# Altium PCB senzMate_ecandMoisture_pcb_design_cycle_2.PcbDoc (part 1 of 2)
Units mil, origin at the board's own origin, x right, y up, seen from the top; angles counter-clockwise.
Board outline 984.25 x 5177.17 mil, 2 copper layers (Top Layer, Bottom Layer); 38 components, 18 nets, 84 pads, 27 vias.
Unrouted connection lines stored in the file: 1.
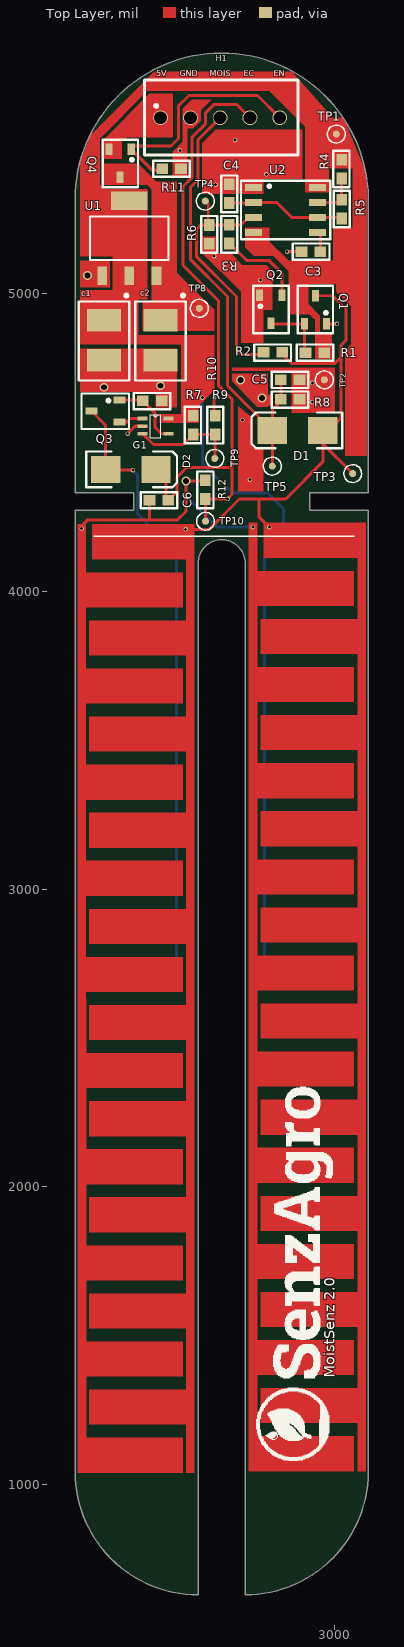
[diagram p0: Top Layer view]
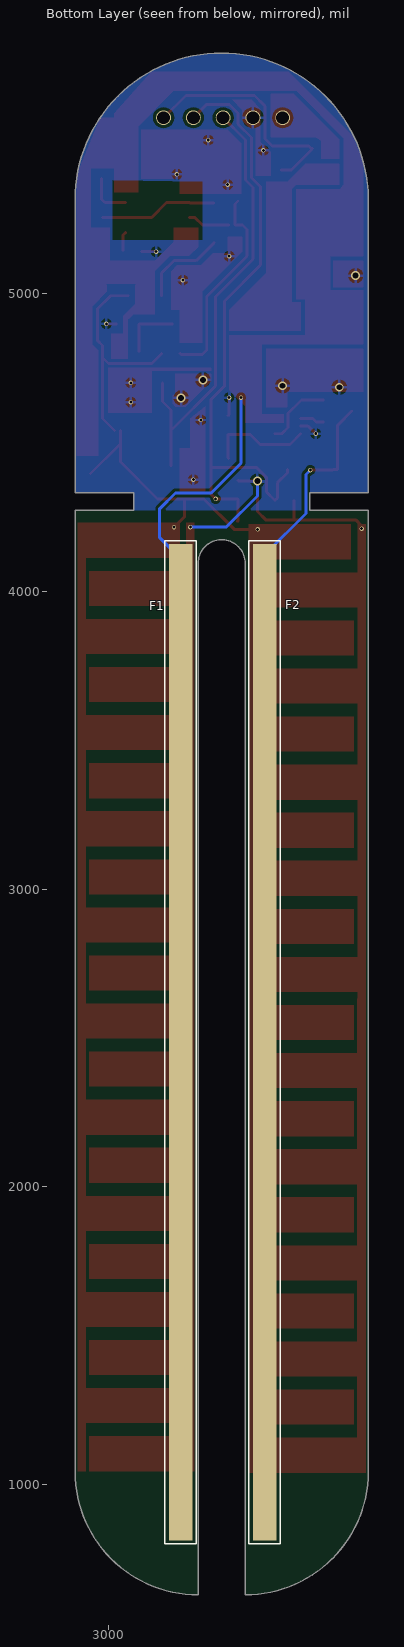
[diagram p1: Bottom Layer view, seen from below]
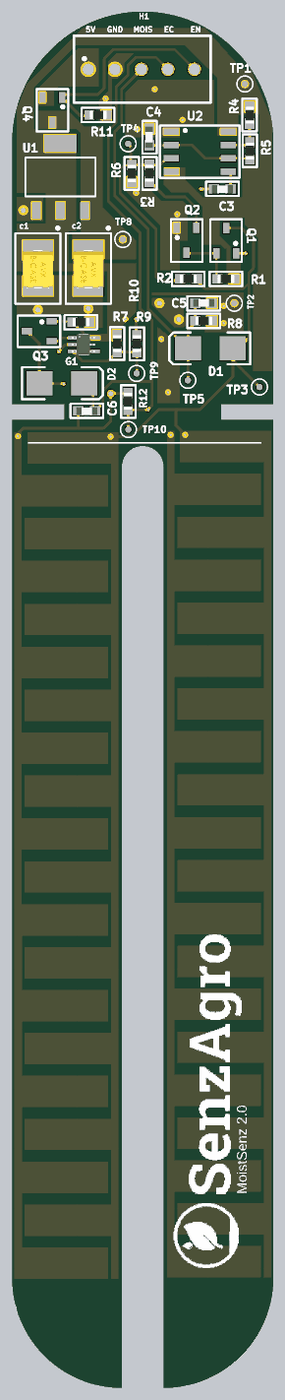
[diagram p2: 3D render of the assembled board from above, using the file's embedded part models]

## Layer stack, top to bottom
Top Solder: solder mask 0.4, Solder Resist, Dk 3.5
Top Layer: signal copper 1.4
Dielectric 1: dielectric 12.6, FR-4, Dk 4.8
Bottom Layer: signal copper 1.4
Bottom Solder: solder mask 0.4, Solder Resist, Dk 3.5

## Board outline
2127.87,1043.26 2127.87,4271.61 2324.72,4271.61 2324.72,4330.66 2127.87,4330.66 2127.87,5314.91 cw(c2620,5314.91) 3112.13,5314.91 3112.13,4330.66 2915.28,4330.66 2915.28,4271.61 3112.13,4271.61 3112.13,1043.26 cw(c2698.74,1043.26) 2698.74,629.87 2698.74,4094.44 ccw(c2620,4094.44) 2541.26,4094.44 2541.26,629.87 cw(c2541.26,1043.26)

## Design rules (kind name [scope] priority, off if disabled: settings)
Clearance [All] p1: gap=10 ignorepadtopadclearanceinfootprint=FALSE except(0: Arc-Hole Track-Hole SMDPad-Hole THPad-Hole Via-Hole Fill-Hole Poly-Hole Region-Hole Text-Hole)
MinimumSolderMaskSliver [All] p1: minsoldermaskwidth=4
PolygonConnect [All] p1: connectstyle=Relief reliefconductorwidth=10 reliefentries=4 polygonreliefangle="90 Angle" airgapwidth=10
RoutingVias [All] p1: holewidth=10 width=15 viastyle="Through Hole" minholewidth=5 minwidth=10 maxholewidth=20 maxwidth=30
SilkToSilkClearance [All] p1: silktosilkclearance=3
SilkToSolderMaskClearance [IsPad] p1: minsilkscreentomaskgap=4 clearancetoexposedcopper=TRUE
SolderMaskExpansion [All] p1: expansion=4
Width [All] p1: maxlimit=30 minlimit=10 preferedwidth=10
27 further rules are at their usual default settings.

## Components (designator, comment, footprint, x,y, rotation, side; value= is the part's Value field where it differs from the comment)
c1 "100uf" TAN_CAP 2225,4842.68 r270 top value=100uF
c2 "10uf" TAN_CAP 2415,4842.68 r270 top value=10uF
C3 "SMT Ceremic capacitors" CAPACITOR_0603 2920,5140 r0 top value=0.1uF
C4 "SMT Ceremic capacitors" CAPACITOR_0603 2645,5335 r270 top value=390pF
C5 "SMT Ceremic capacitors" CAPACITOR_0603 2850,4710 r180 top value=10uF
C6 "SMT Ceremic capacitors" CAPACITOR_0603 2409,4305 r0 top value=10uF
D1 "Diode" DIODE 2875,4540 r180 top
D2 "Diode" DIODE 2315,4409 r0 top
F1 "Hole" HOLE 2758,2486 r90 bottom
F2 "Hole" HOLE 2476,2486 r90 bottom
G1 "LMV721" LM721 2355,4580 r0 top
H1 "HEADER_1X" CONNECTOR 2565,5590 r0 top
Q1 "" SOT95P245X110-3N 2935,4945 r90 top
Q2 "" SOT95P245X110-3N 2785,4946.97 r270 top
Q3 "MMBT3904" SOT95P245X110-3N 2230,4605 r180 top
Q4 "SI2307" SI2307 2285,5435 r270 top
R1 "Res3" RES_0603 2935,4805 r0 top value=10K
R2 "Res3" RES_0603 2790,4798.11 r180 top value=2.7K
R3 "Res3" RES_0603 2648.94,5197.05 r270 top value=10K
R4 "Res3" RES_0603 3018.91,5419.53 r90 top value=4.7K
R5 "Res3" RES_0603 3020,5285 r90 top value=4.7K
R6 "Res3" RES_0603 2575,5200 r90 top value=10K
R7 "Res3" RES_0603 2520,4560 r90 top value=10K
R8 "Res3" RES_0603 2848.03,4640 r180 top value=1M
R9 "Res3" RES_0603 2602,4556 r270 top value=1K
R10 "Res3" RES_0603 2385,4635 r180 top value=45.3K
R11 "Res3" RES_0603 2450,5415 r180 top value=1M
R12 "Res3" RES_0603 2569,4339 r270 top value=1M
TP1 "Test points" TEST_POINT 3005,5535 r90 top
TP2 "Test points" TEST_POINT 2965,4710 r90 top
TP3 "Test points" TEST_POINT 3060,4395 r90 top
TP4 "Test points" TEST_POINT 2565,5310 r90 top
TP5 "Test points" TEST_POINT 2790,4420 r90 top
TP8 "Test points" TEST_POINT 2545,4950 r90 top
TP9 "Test points" TEST_POINT 2597,4446 r90 top
TP10 "Test points" TEST_POINT 2566,4235 r90 top
U1 "LM1117MP-3.3" *SOT230P696X180-4N 2310,5185 r90 top
U2 "TS555" SOP127P600X175-8N 2835,5280 r0 top

## Footprints (in the part's own frame and the unit in brackets; to place one, negate y for a bottom-side part, rotate by r counter-clockwise, add the part's x,y. Pads: shape width x height; smd on the part's side, far side on the other; paste and mask are expansions set on the pad)
*SOT230P696X180-4N [mil]
  rect 63x33 smd: 1(-126,91) 2(-126,0) 3(-126,-91)
  rect 63x122 smd: 4(126,0)
  silkscreen extent -73,-132 73,132
CAPACITOR_0603 [mm]
  rect 1x0.9 smd: 1(-0.8,0) 2(0.8,0)
  silkscreen extent -1.55,-0.67 1.58,0.7, body extent -1,-0.41 1,0.35, height 1.36
CONNECTOR [mm]
  round 1.27 hole 1.1: 1(-3.81,0) 2(-1.27,0) 3(1.27,0) 4(3.81,0) 5(6.35,0)
  silkscreen extent -5.2,-3.17 7.9,3.2
DIODE [mm]
  rect 2.5x2.3 smd: 1(-2.15,0) 2(2.15,0)
  silkscreen extent -3.81,-1.52 3.94,1.52
HOLE [mm]
  rect 85x2 smd: 1(0,0)
  silkscreen extent -42.8,-1.35 42.75,1.35
LM721 [mm]
  rect 0.85x0.32 smd: 1(0,0) 2(0,-0.65) 3(0,-1.3) 4(2.2,-1.3) 5(2.2,0)
  silkscreen extent 0.64,-1.63 1.52,0.33, body extent -0.05,-1.65 2.15,0.35, height 1.01
RES_0603 [mm]
  rect 1x0.9 smd: 1(-0.85,-0.1) 2(0.75,-0.1)
  silkscreen extent -1.6,-0.77 1.53,0.6, body extent -0.85,-0.5 0.75,0.3, height 0.41
SI2307 [mm]
  rect 1x0.6 smd: 1(-1.25,0.8) 2(-1.25,-1.1) 3(1.15,-0.15)
  silkscreen extent -2.05,-1.64 2,1.37, body extent -0.75,-1.65 0.65,1.35, height 1.1
SOP127P600X175-8N [mm] "SOP, 8-Leads, Body 4.90x3.90mm, Pitch 1.27mm, IPC Medium Density"
  rect 1.45x0.6 smd: 1(-2.725,1.905) 2(-2.725,0.635) 3(-2.725,-0.635) 4(-2.725,-1.905) 5(2.725,-1.905) 6(2.725,-0.635) 7(2.725,0.635) 8(2.725,1.905)
  silkscreen extent -3.81,-2.5 3.81,2.5, body extent -2,-2.5 2,2.5, height 1.75
SOT95P245X110-3N [mm] "SOT23, 3-Leads, Body 2.90x2.45mm, Pitch 0.95mm, IPC Medium Density"
  rect 1x0.6 smd: 1(-1.2,-0.95) 2(-1.2,0.95) 3(1.2,0)
  silkscreen extent -2,-1.49 2.05,1.52, body extent -0.7,-1.5 0.7,1.5, height 1.1
TAN_CAP [mm]
  rect 1.9x2.88 smd: 1(-1.71,0) 2(1.71,0)
  silkscreen extent -3.94,-2.16 3.43,2.16, body extent -1.72,-1.46 1.98,1.47, height 2.03
TEST_POINT [mm]
  round 0.6 smd: 1(0,0)
  silkscreen extent -0.76,-0.76 0.76,0.76

## Part data
c1: library part tant_cap, "Tantalum Surface Mount Capacitors – Standard Tantalum", Capacitance=100uF, Case/Package=1411, Case Code (Metric)=3528, Dielectric Material=Tantalum, ESR (Equivalent Series Resistance)=40mR, Leakage Current=63uA, Manufacturer=KEMET, Manufacturer Part Number=T520B107M006ATE040, Max Operating Temperature=105°C, Min Operating Temperature=-55°C, Package Quantity=1, Ripple Current=3A, Supplier Part Number 1=399-4008-1-ND, Tolerance=20%, Voltage=6.3V, Voltage Rating (DC)=6V, Case Code (Imperial)=1411, ComponentLink1Description=http://www.mouser.com/ds/2/212/KEM_T2015_T520-368569.pdf?src-supplier=Mouser, ComponentLink1URL=http://www.mouser.com/ds/2/212/KEM_T2015_T520-368569.pdf?src-supplier=Mouser, ComponentLink2Description=https://www.verical.com/server-webapp/html/getDatasheet?partID=72546&src-supplier=Verical, ComponentLink2URL=https://www.verical.com/server-webapp/html/getDatasheet?partID=72546&src-supplier=Verical, ComponentLink3Description=https://www.distrelec.biz/Web/Downloads/_t/ds/KEM_T2015_T520_eng_tds.pdf?mime=application%2Fpdf&src-supplier=Distrelec, ComponentLink3URL=https://www.distrelec.biz/Web/Downloads/_t/ds/KEM_T2015_T520_eng_tds.pdf?mime=application%2Fpdf&src-supplier=Distrelec, ComponentLink4Description=https://www.alliedelec.com/m/d/1e5f3e263f50a84b9c01f3b24923ff5b.pdf?src-supplier=Allied+Electronics, ComponentLink4URL=https://www.alliedelec.com/m/d/1e5f3e263f50a84b9c01f3b24923ff5b.pdf?src-supplier=Allied+Electronics, ComponentLink5Description=http://www.farnell.com/datasheets/40865.pdf?src-supplier=Farnell, ComponentLink5URL=http://www.farnell.com/datasheets/40865.pdf?src-supplier=Farnell, ComponentLink6Description=https://content.kemet.com/datasheets/KEM_T2076_T52X-530.pdf?src-supplier=Digi-Key, ComponentLink6URL=https://content.kemet.com/datasheets/KEM_T2076_T52X-530.pdf?src-supplier=Digi-Key, ComponentLink7Description=http://www.kemet.com/kemet/web/homepage/kechome.nsf/file/T520%20Series/$file/KEM_T2015_T520.pdf?src-supplier=Element14, ComponentLink7URL=http://www.kemet.com/kemet/web/homepage/kechome.nsf/file/T520%20Series/$file/KEM_T2015_T520.pdf?src-supplier=Element14, Depth=2.8mm, Dissipation Factor=8%, Features="General Purpose", Height=1.9mm, Height - Seated (Max)=0.083inch, Lead Free="Lead Free", Lead Pitch=1.9mm, Length=3.5mm, Life (Hours)=2000Hour, Mount="Surface Mount,PCB", Number of Pins=2, Packaging="Tape and Reel", Polarity=Polar, Pricing 1="1=0.88, 10=0.665, 100=0.4759, 500=0.3685, 1000=0.3173 (USD)", Radiation Hardening=No, REACH SVHC="No SVHC", Stock 1=86697, Supplier 1=Digi-Key, Termination=SMD/SMT, Voltage Rating=6.3V, Width=2.8mm
c2: library part tant_cap, "Tantalum Surface Mount Capacitors – Standard Tantalum", Capacitance=10uF, Case/Package=1411, Case Code (Metric)=3528, Dielectric Material=Tantalum, ESR (Equivalent Series Resistance)=3.5R, Leakage Current=600nA, Manufacturer=KEMET, Manufacturer Part Number=T491B106K006AT, Max Operating Temperature=125°C, Min Operating Temperature=-55°C, Package Quantity=1, Ripple Current=156mA, Supplier Part Number 1=399-3704-1-ND, Tolerance=10%, Voltage=6.3V, Case Code (Imperial)=1411, ComponentLink1Description=http://www.mouser.com/ds/2/212/KEM_T2005_T491-1093550.pdf?src-supplier=Mouser, ComponentLink1URL=http://www.mouser.com/ds/2/212/KEM_T2005_T491-1093550.pdf?src-supplier=Mouser, ComponentLink2Description=https://www.verical.com/server-webapp/html/getDatasheet?partID=114876&src-supplier=Verical, ComponentLink2URL=https://www.verical.com/server-webapp/html/getDatasheet?partID=114876&src-supplier=Verical, ComponentLink3Description=https://search.kemet.com/component-edge/download/datasheet/T491B106K006AT.pdf?src-supplier=Digi-Key, ComponentLink3URL=https://search.kemet.com/component-edge/download/datasheet/T491B106K006AT.pdf?src-supplier=Digi-Key, ComponentLink4Description=https://www.alliedelec.com/m/d/1172a60f7bb3eb66344f86e8fb9ddbde.pdf?src-supplier=Allied+Electronics, ComponentLink4URL=https://www.alliedelec.com/m/d/1172a60f7bb3eb66344f86e8fb9ddbde.pdf?src-supplier=Allied+Electronics, ComponentLink5Description=http://www.kemet.com/kemet/web/homepage/kechome.nsf/file/T491%20Series/$file/KEM_T2005_T491.pdf?src-supplier=Farnell, ComponentLink5URL=http://www.kemet.com/kemet/web/homepage/kechome.nsf/file/T491%20Series/$file/KEM_T2005_T491.pdf?src-supplier=Farnell, ComponentLink6Description=http://www.farnell.com/datasheets/1854511.pdf?src-supplier=Element14, ComponentLink6URL=http://www.farnell.com/datasheets/1854511.pdf?src-supplier=Element14, ComponentLink7Description=http://www.kemet.com/kemet/web/homepage/kechome.nsf/file/T491%20Series/$file/KEM_T2005_T491.pdf?src-supplier=Element14, ComponentLink7URL=http://www.kemet.com/kemet/web/homepage/kechome.nsf/file/T491%20Series/$file/KEM_T2005_T491.pdf?src-supplier=Element14, ComponentLink8Description=http://www.jameco.com/Jameco/Products/ProdDS/1640982.pdf?src-supplier=Jameco, ComponentLink8URL=http://www.jameco.com/Jameco/Products/ProdDS/1640982.pdf?src-supplier=Jameco, ComponentLink9Description=https://www.distrelec.biz/Web/Downloads/_t/ds/KEM_T2005_T491_eng_tds.pdf?mime=application%2Fpdf&src-supplier=Distrelec, ComponentLink9URL=https://www.distrelec.biz/Web/Downloads/_t/ds/KEM_T2005_T491_eng_tds.pdf?mime=application%2Fpdf&src-supplier=Distrelec, ComponentLink10Description=http://www.rapidonline.com/pdf/458281_da_en_01.pdf?src-supplier=Rapid+Electronics, ComponentLink10URL=http://www.rapidonline.com/pdf/458281_da_en_01.pdf?src-supplier=Rapid+Electronics, ComponentLink11Description=http://uk.rs-online.com/webdocs/1529/0900766b815290d2.pdf?src-supplier=RSComponents, ComponentLink11URL=http://uk.rs-online.com/webdocs/1529/0900766b815290d2.pdf?src-supplier=RSComponents, Depth=2.8mm, Dissipation Factor=6%, Features="General Purpose", Height=1.9mm, Height - Seated (Max)=0.083inch, Lead Free="Lead Free", Length=3.5mm, Life (Hours)=2000Hour, Mount="Surface Mount,PCB", Number of Pins=2, Packaging="Tape and Reel", Polarity=Polar, Pricing 1="1=0.49, 10=0.345, 100=0.227, 500=0.1681, 1000=0.1429 (USD)", Radiation Hardening=No, REACH SVHC="No SVHC", Stock 1=12761, Supplier 1=Digi-Key, Termination=SMD/SMT, Voltage Rating=6.3V, Voltage Rating (DC)=6.3V, Weight=0.002293oz, Width=2.8mm
C3: library part Cap, "Capacitor", Capacitance=0.10µF, Manufacturer=TDK, Manufacturer Part Number=CGA3E2X8R1E104K080AE, Operating Temperature="-55°C ~ 150°C", Package / Case="0603 (1608 Metric)", Ratings=AEC-Q200, Supplier Part Number 1=445-173658-1-ND, Temperature Coefficient=X8R, Tolerance=±10%, Voltage - Rated=25V, Applications="Automotive, Boardflex Sensitive", Category=Capacitors, Family="Ceramic Capacitors", Features="Soft Termination", Height - Seated (Max)=-, LatestRevisionDate=17-Jul-2002, LatestRevisionNote="Re-released for DXP Platform.", Lead Spacing=-, Lead Style=-, Mounting Type="Surface Mount, MLCC", PackageDescription="Radial Cap, Thru-Hole; 2 Leads; 0.3 in Pin Spacing", PackageReference=RAD-0.3, Packaging="Tape & Reel (TR)", Pricing 1="1=0.27, 10=0.182, 100=0.1032, 500=0.0729, 1000=0.0638 (USD)", Published=8-Jun-2000, Publisher="Altium Limited", Series=CGA, Size / Dimension="0.063\" L x 0.031\" W (1.60mm x 0.80mm)", Stock 1=0, Supplier 1=Digi-Key, Thickness (Max)="0.037\" (0.95mm)"
C4: library part Cap, "Capacitor", Capacitance=390pF, Manufacturer=TDK, Manufacturer Part Number=CGA3E2C0G1H391J080AA, Operating Temperature="-55°C ~ 125°C", Package / Case="0603 (1608 Metric)", PCN Part Number="MLCC Part Number Change 30/Nov/2012", Ratings=AEC-Q200, Standard Package=1, Supplier Part Number 1=445-5647-1-ND, Temperature Coefficient="C0G, NP0", Tolerance=±5%, Voltage - Rated=50V, Applications=Automotive, Category=Capacitors, ComponentLink1Description=http://www.mouser.com/ds/2/400/lcc_automotive_general_en-843974.pdf?src-supplier=Mouser, ComponentLink1URL=http://www.mouser.com/ds/2/400/lcc_automotive_general_en-843974.pdf?src-supplier=Mouser, EDA / CAD Models="Download from Accelerated Designs", Family="Ceramic Capacitors", Featured Product="CGA Series MLCC Capacitors", LatestRevisionDate=17-Jul-2002, LatestRevisionNote="Re-released for DXP Platform.", Mounting Type="Surface Mount, MLCC", Online Catalog="CGA Series, Automotive General, Mid and High Voltage", Other Names=445-5647-6, PackageDescription="Radial Cap, Thru-Hole; 2 Leads; 0.3 in Pin Spacing", PackageReference=RAD-0.3, Packaging=Digi-Reel®, Pricing 1="1=0.22, 10=0.153, 100=0.072, 500=0.0505, 1000=0.0418 (USD)", Product Training Modules="CGA Series for Automotive Applications SEAT, CCV, and TVCL Design Tools Guide to Replacing an Electrolytic Capacitor with an MLCC", Published=8-Jun-2000, Publisher="Altium Limited", RoHS Information="CGA Series, RoHS Cert of Compliance", Series=CGA, Size / Dimension="0.063\" L x 0.031\" W (1.60mm x 0.80mm)", Stock 1=2144, Supplier 1=Digi-Key, Thickness (Max)="0.035\" (0.90mm)"
C5 C6: library part Cap, "Capacitor", Capacitance=10µF, Manufacturer=TDK, Manufacturer Part Number=C1608X5R1C106M080AB, Operating Temperature="-55°C ~ 85°C", Package / Case="0603 (1608 Metric)", PCN Part Number="MLCC Part Number Change 30/Nov/2012", Standard Package=1, Supplier Part Number 1=445-9065-1-ND, Temperature Coefficient=X5R, Tolerance=±20%, Voltage - Rated=16V, Applications="General Purpose", Category=Capacitors, ComponentLink1Description=https://www.verical.com/server-webapp/html/getDatasheet?partID=727879&src-supplier=Verical, ComponentLink1URL=https://www.verical.com/server-webapp/html/getDatasheet?partID=727879&src-supplier=Verical, ComponentLink2Description=http://www.mouser.com/ds/2/400/lcc_commercial_general_en-837201.pdf?src-supplier=Mouser, ComponentLink2URL=http://www.mouser.com/ds/2/400/lcc_commercial_general_en-837201.pdf?src-supplier=Mouser, ComponentLink3Description=http://product.tdk.com/capacitor/mlcc/en/documents/mlcc_commercial_general_en.pdf?src-supplier=Future+Electronics, ComponentLink3URL=http://product.tdk.com/capacitor/mlcc/en/documents/mlcc_commercial_general_en.pdf?src-supplier=Future+Electronics, Design Resources="20 W Non-Isolated Buck LED Driver Using PL LNK460KG", EDA / CAD Models="Download from Accelerated Designs", Family="Ceramic Capacitors", LatestRevisionDate=17-Jul-2002, LatestRevisionNote="Re-released for DXP Platform.", Mounting Type="Surface Mount, MLCC", Online Catalog="C Series, General Purpose", Other Names=445-9065-6, PackageDescription="Radial Cap, Thru-Hole; 2 Leads; 0.3 in Pin Spacing", PackageReference=RAD-0.3, Packaging=Digi-Reel®, Pricing 1="1=0.85, 10=0.629, 100=0.4313, 500=0.3414, 1000=0.2875 (USD)", Product Training Modules="SEAT, CCV, and TVCL Design Tools Guide to Replacing an Electrolytic Capacitor with an MLCC", Published=8-Jun-2000, Publisher="Altium Limited", RoHS Information="RoHS Certificate-MLCC", Series=C, Size / Dimension="0.063\" L x 0.031\" W (1.60mm x 0.80mm)", Stock 1=95952, Supplier 1=Digi-Key, Thickness (Max)="0.039\" (1.00mm)"
D1 D2: Average Rectified Current=1A, Capacitance=15pF, Case/Package=SMB, Forward Voltage=1.3V, Manufacturer=Diodes, Manufacturer Part Number=RS1AB-13-F, Max Operating Temperature=150°C, Max Repetitive Reverse Voltage (Vrrm)=50V, Max Surge Current=30A, Min Operating Temperature=-65°C, Package Quantity=3000, Peak Reverse Current=5uA, Supplier Part Number 1=RS1AB-FDICT-ND, ComponentLink1Description=http://www.diodes.com///datasheets/ds15002.pdf?src-supplier=Avnet, ComponentLink1URL=http://www.diodes.com///datasheets/ds15002.pdf?src-supplier=Avnet, Current Rating=1A, Element Configuration=Single, Forward Current=1A, Height=2.42mm, Lead Free="Lead Free", Length=4.57mm, Max Reverse Voltage (DC)=50V, Mount="Surface Mount", Number of Pins=2, Output Current=1A, Packaging="Tape and Reel", Peak Non-Repetitive Surge Current=30A, Polarity=Standard, Pricing 1="1=0.4, 10=0.302, 100=0.1879, 500=0.1285, 1000=0.0989 (USD)", Radiation Hardening=No, Recovery Time=150ns, Reverse Recovery Time=150ns, Reverse Voltage (DC)=50V, Stock 1=31687, Supplier 1=Digi-Key, Voltage Rating (DC)=50V, Weight=0.00328oz, Width=3.94mm
G1: library part lm721, "2.7V to 5V Comparator with Rail-to-Rail Output", Case/Package=SC, Input Bias Current=260nA, Input Offset Voltage (Vos)=3mV, Manufacturer="Texas Instruments", Manufacturer Part Number=LMV721IDCKR, Max Operating Temperature=105°C, Max Supply Voltage=5V, Min Operating Temperature=-40°C, Min Supply Voltage=2.2V, Nominal Supply Current=1.4mA, Operating Supply Current=1.03mA, Output Current=17.6mA, Output Current per Channel=52.6mA, Package Quantity=3000, Power Supply Rejection Ratio (PSRR)=70dB, Supplier Part Number 1=296-36890-1-ND, Voltage Gain=94dB, Bandwidth=10MHz, Common Mode Rejection Ratio=80dB, ComponentLink1Description=http://www.ti.com/lit/ds/symlink/lmv721.pdf?src-supplier=Digi-Key, ComponentLink1URL=http://www.ti.com/lit/ds/symlink/lmv721.pdf?src-supplier=Digi-Key, ComponentLink2Description=http://www.ti.com/general/docs/lit/getliterature.tsp?genericPartNumber=LMV722&&fileType=pdf&src-supplier=Avnet, ComponentLink2URL=http://www.ti.com/general/docs/lit/getliterature.tsp?genericPartNumber=LMV722&&fileType=pdf&src-supplier=Avnet, Gain Bandwidth Product=10MHz, Lead Free="Lead Free", Mount="Surface Mount", Number of Channels=1, Number of Circuits=1, Number of Elements=1, Number of Pins=5, Packaging="Tape and Reel", Pricing 1="1=1.02, 10=0.912, 100=0.7107, 500=0.5871, 1000=0.4635 (USD)", Radiation Hardening=No, Slew Rate=5.25V/µs, Stock 1=11033, Supplier 1=Digi-Key, Unity Gain Bandwidth Product=10MHz
H1: library part HEADER1X5, Color=Natural, Contact Resistance=20mR, Current Rating=1A, Housing Color=White, Insulation Resistance=500MR, Manufacturer=JST, Manufacturer Part Number=ZHR-5, Max Operating Temperature=85°C, Max Voltage Rating (AC)=50V, Min Operating Temperature=-25°C, Supplier Part Number 1=455-1201-ND, Test Voltage=500V, ComponentLink1Description=https://www.verical.com/server-webapp/html/getDatasheet?partID=454593&src-supplier=Verical, ComponentLink1URL=https://www.verical.com/server-webapp/html/getDatasheet?partID=454593&src-supplier=Verical, ComponentLink2Description=http://www.farnell.com/datasheets/1393424.pdf?src-supplier=Element14, ComponentLink2URL=http://www.farnell.com/datasheets/1393424.pdf?src-supplier=Element14, ComponentLink3Description=https://www.distrelec.biz/Web/Downloads/_t/ds/zh-series_eng_tds.pdf?mime=application%2Fpdf&src-supplier=Distrelec, ComponentLink3URL=https://www.distrelec.biz/Web/Downloads/_t/ds/zh-series_eng_tds.pdf?mime=application%2Fpdf&src-supplier=Distrelec, ComponentLink4Description=http://www1.futureelectronics.com/doc/JST/ZHR-5.pdf?src-supplier=Future+Electronics, ComponentLink4URL=http://www1.futureelectronics.com/doc/JST/ZHR-5.pdf?src-supplier=Future+Electronics, Connector Type=Receptacle,Socket, Contact Material=Bronze,Tin, Depth=4.8mm, Gender=Receptacle, Height=0.16inch, Housing Material=Polyamide, Lead Free="Lead Free", Length=9mm, Max Current Rating=1A, Max Voltage Rating (DC)=50V, Mount="Free Hanging,Cable", Number of Contacts=5, Number of Positions=5, Number of Rows=1, Orientation=Straight, Packaging=Bag, Pitch=1.5mm, Pricing 1="1=0.1, 10=0.089, 25=0.0664, 50=0.057, 100=0.055, 250=0.0474, 500=0.0456, 1000=0.0399, 2500=0.0361 (USD)", REACH SVHC="No SVHC", Stock 1=14765, Supplier 1=Digi-Key, Termination=Crimp, Weight=0.0625lb, Width=3.4mm
Q1 Q2 Q3: library part npn, "Transistor npn", Collector- Base Voltage VCBO="30 V", Collector-Emitter Saturation Voltage="200 V", Continuous Collector Current="0.1 A", DC Current Gain hFE Max="800 at 2 mA at 5 V", Emitter- Base Voltage VEBO="5 V", Manufacturer=Diodes, Manufacturer Part Number=BC848C-7-F, Maximum Operating Temperature="+ 150 C", Minimum Operating Temperature="- 65 C", Package / Case=SOT-23-3, Pd - Power Dissipation="350 mW", Supplier Part Number 1=BC848C-7FDITR-ND, Brand="Diodes Incorporated", Collector- Emitter Voltage VCEO Max="30 V", ComponentLink1Description=http://www.diodes.com///datasheets/ds11108.pdf?src-supplier=Avnet+Europe, ComponentLink1URL=http://www.diodes.com///datasheets/ds11108.pdf?src-supplier=Avnet+Europe, Configuration=Single, DC Collector/Base Gain hfe Min=420, Factory Pack Quantity=3000, Gain Bandwidth Product fT="300 MHz", Height="1 mm", Length="3.05 mm", Maximum DC Collector Current="0.1 A", Mounting Style=SMD/SMT, Packaging=Reel, Pricing 1="3000=0.0365, 6000=0.0329, 15000=0.0286, 30000=0.0257, 75000=0.0229, 150000=0.019 (USD)", Product Category="Bipolar Transistors - BJT", RoHS=True, Series=BC848C, Stock 1=120000, Supplier 1=Digi-Key, Transistor Polarity=NPN, Unit Weight="0.000282 oz", Width="1.4 mm"
Q4: "P-Channel 30-V (D-S) MOSFET", Case/Package=TO-236, Continuous Drain Current (ID)=2.5A, Drain to Source Breakdown Voltage=-30V, Drain to Source Resistance=78mR, Drain to Source Voltage (Vdss)=30V, Gate to Source Voltage (Vgs)=20V, Input Capacitance=380pF, Manufacturer="Vishay Siliconix", Manufacturer Part Number=SI2307BDS-T1-E3, Max Operating Temperature=150°C, Max Power Dissipation=750mW, Min Operating Temperature=-55°C, Package Quantity=1, Supplier Part Number 1=SI2307BDS-T1-E3CT-ND, Threshold Voltage=-3V, ComponentLink1Description=http://www.vishay.com/docs/72699/72699.pdf?src-supplier=Digi-Key, ComponentLink1URL=http://www.vishay.com/docs/72699/72699.pdf?src-supplier=Digi-Key, ComponentLink2Description=http://www.vishay.com/docs/72699/72699.pdf?src-supplier=Avnet+Europe, ComponentLink2URL=http://www.vishay.com/docs/72699/72699.pdf?src-supplier=Avnet+Europe, ComponentLink3Description=http://www.vishay.com/docs/72699/72699.pdf?src-supplier=Farnell, ComponentLink3URL=http://www.vishay.com/docs/72699/72699.pdf?src-supplier=Farnell, ComponentLink4Description=https://www.verical.com/server-webapp/html/getDatasheet?partID=74726&src-supplier=Verical, ComponentLink4URL=https://www.verical.com/server-webapp/html/getDatasheet?partID=74726&src-supplier=Verical, ComponentLink5Description=http://www.farnell.com/datasheets/2049185.pdf?src-supplier=Element14, ComponentLink5URL=http://www.farnell.com/datasheets/2049185.pdf?src-supplier=Element14, ComponentLink6Description=http://datasheet.iiic.cc/vishay_[siliconix]/SI2307BDS-T1-E3.pdf?src-supplier=IIIC, ComponentLink6URL=http://datasheet.iiic.cc/vishay_[siliconix]/SI2307BDS-T1-E3.pdf?src-supplier=IIIC, Element Configuration=Single, Fall Time=12ns, Height=1.02mm, Lead Free="Lead Free", Length=3.04mm, Mount="Surface Mount", Nominal Vgs=-3V, Number of Channels=1, Number of Elements=1, Number of Pins=3, On-State Resistance=78mR, Packaging="Tape and Reel", Power Dissipation=750mW, Pricing 1="1=0.52, 10=0.446, 100=0.3331, 500=0.2617, 1000=0.2022 (USD)", Radiation Hardening=No, Rds On Max=78mR, REACH SVHC=Unknown, Rise Time=12ns, Stock 1=33368, Supplier 1=Digi-Key, Turn-Off Delay Time=25ns, Turn-On Delay Time=9ns, Weight=0.050717oz, Width=1.4mm
R1 R2 R3 R6 R7: "Resistor", Case/Package=0603, Case Code (Metric)=1608, Manufacturer=Panasonic, Manufacturer Part Number=ERJ-3EKF1002V, Max Operating Temperature=155°C, Max Power Dissipation=100mW, Min Operating Temperature=-55°C, Package Quantity=1, Resistance=10kR, Supplier Part Number 1=P10.0KHCT-ND, Temperature Coefficient=100ppm/°C, Tolerance=1%, Voltage Rating=75V, Case Code (Imperial)=0603, ComponentLink1Description=https://industrial.panasonic.com/cdbs/www-data/pdf/RDA0000/DMA0000COL11.pdf?src-supplier=Avnet+Asia, ComponentLink1URL=https://industrial.panasonic.com/cdbs/www-data/pdf/RDA0000/DMA0000COL11.pdf?src-supplier=Avnet+Asia, ComponentLink2Description=http://www.farnell.com/datasheets/1911175.pdf?src-supplier=Element14, ComponentLink2URL=http://www.farnell.com/datasheets/1911175.pdf?src-supplier=Element14, ComponentLink3Description=https://industrial.panasonic.com/cdbs/www-data/pdf/RDA0000/DMA0000COL11.pdf?src-supplier=Avnet, ComponentLink3URL=https://industrial.panasonic.com/cdbs/www-data/pdf/RDA0000/DMA0000COL11.pdf?src-supplier=Avnet, ComponentLink4Description=http://industrial.panasonic.com/www-data/pdf/AOA0000/AOA0000CE2.pdf?src-supplier=Avnet+Europe, ComponentLink4URL=http://industrial.panasonic.com/www-data/pdf/AOA0000/AOA0000CE2.pdf?src-supplier=Avnet+Europe, ComponentLink5Description=http://industrial.panasonic.com/www-data/pdf/AOA0000/AOA0000CE2.pdf?src-supplier=Avnet, ComponentLink5URL=http://industrial.panasonic.com/www-data/pdf/AOA0000/AOA0000CE2.pdf?src-supplier=Avnet, ComponentLink6Description=https://industrial.panasonic.com/cdbs/www-data/pdf/RDA0000/DMA0000COL11.pdf?src-supplier=Mouser, ComponentLink6URL=https://industrial.panasonic.com/cdbs/www-data/pdf/RDA0000/DMA0000COL11.pdf?src-supplier=Mouser, ComponentLink7Description=https://industrial.panasonic.com/cdbs/www-data/pdf/RDA0000/DMA0000COL11.pdf?src-supplier=Allied+Electronics, ComponentLink7URL=https://industrial.panasonic.com/cdbs/www-data/pdf/RDA0000/DMA0000COL11.pdf?src-supplier=Allied+Electronics, Composition="Thick Film", Contact Plating=Tin, Depth=0.8mm, Features="Automotive AEC-Q200", Height=0.45mm, LatestRevisionDate=29-May-2009, LatestRevisionNote="IPC-7351 Footprint Added.", Lead Free="Lead Free", Length=1.6mm, Military Standard=Not, Mount="Surface Mount", Number of Pins=2, Number of Terminations=2, PackageDescription="Chip Resistor", PackageReference=J1-0603, Packaging="Tape and Reel", Power Rating=100mW, Pricing 1="1=0.1, 10=0.065, 100=0.0264, 1000=0.0119, 2500=0.0103 (USD)", Published=8-Jun-2000, Publisher="Altium Limited", Radiation Hardening=No, REACH SVHC="No SVHC", Stock 1=10990122, Supplier 1=Digi-Key, Termination=SMD/SMT, Voltage Rating (DC)=75V, Width=0.031inch
R4 R5: "Resistor", Case/Package=0603, Case Code (Metric)=1608, Manufacturer=Panasonic, Manufacturer Part Number=ERJ-3EKF4701V, Max Operating Temperature=155°C, Max Power Dissipation=100mW, Min Operating Temperature=-55°C, Package Quantity=1, Resistance=4.7kR, Supplier Part Number 1=P4.70KHCT-ND, Temperature Coefficient=100ppm/°C, Tolerance=1%, Voltage Rating=75V, Case Code (Imperial)=0603, ComponentLink1Description=http://industrial.panasonic.com/www-data/pdf/AOA0000/AOA0000CE2.pdf?src-supplier=Future+Electronics, ComponentLink1URL=http://industrial.panasonic.com/www-data/pdf/AOA0000/AOA0000CE2.pdf?src-supplier=Future+Electronics, ComponentLink2Description=http://industrial.panasonic.com/www-data/pdf/AOA0000/AOA0000CE2.pdf?src-supplier=Avnet+Asia, ComponentLink2URL=http://industrial.panasonic.com/www-data/pdf/AOA0000/AOA0000CE2.pdf?src-supplier=Avnet+Asia, ComponentLink3Description=http://www.farnell.com/datasheets/1911175.pdf?src-supplier=Element14, ComponentLink3URL=http://www.farnell.com/datasheets/1911175.pdf?src-supplier=Element14, ComponentLink4Description=http://industrial.panasonic.com/www-data/pdf/AOA0000/AOA0000CE2.pdf?src-supplier=Avnet, ComponentLink4URL=http://industrial.panasonic.com/www-data/pdf/AOA0000/AOA0000CE2.pdf?src-supplier=Avnet, ComponentLink5Description=http://www.alliedelec.com/m/d/623f45ff1957d936ff56d46fd1c28cac.pdf?src-supplier=Allied+Electronics, ComponentLink5URL=http://www.alliedelec.com/m/d/623f45ff1957d936ff56d46fd1c28cac.pdf?src-supplier=Allied+Electronics, ComponentLink6Description=http://www.mouser.com/ds/2/315/AOA0000C86-911473.pdf?src-supplier=Mouser, ComponentLink6URL=http://www.mouser.com/ds/2/315/AOA0000C86-911473.pdf?src-supplier=Mouser, ComponentLink7Description=http://industrial.panasonic.com/www-data/pdf/AOA0000/AOA0000CE2.pdf?src-supplier=Avnet+Europe, ComponentLink7URL=http://industrial.panasonic.com/www-data/pdf/AOA0000/AOA0000CE2.pdf?src-supplier=Avnet+Europe, ComponentLink8Description=http://industrial.panasonic.com/www-data/pdf/AOA0000/AOA0000CE2.pdf?src-supplier=Element14, ComponentLink8URL=http://industrial.panasonic.com/www-data/pdf/AOA0000/AOA0000CE2.pdf?src-supplier=Element14, Composition="Thick Film", Contact Plating=Tin, Depth=0.8mm, Features="Automotive AEC-Q200", Height=0.022inch, LatestRevisionDate=29-May-2009, LatestRevisionNote="IPC-7351 Footprint Added.", Lead Free="Lead Free", Length=1.6mm, Military Standard=Not, Mount="Surface Mount", Number of Pins=2, Number of Terminations=2, PackageDescription="Chip Resistor", PackageReference=J1-0603, Packaging="Tape and Reel", Power Rating=100mW, Pricing 1="1=0.1, 10=0.065, 100=0.0264, 1000=0.0119, 2500=0.0103 (USD)", Published=8-Jun-2000, Publisher="Altium Limited", Radiation Hardening=No, REACH SVHC="No SVHC", Stock 1=2210222, Supplier 1=Digi-Key, Termination=SMD/SMT, Voltage Rating (DC)=75V, Weight=7.1E-05oz, Width=0.031inch
R8 R11 R12: "Resistor", Case/Package=0603, Case Code (Metric)=1608, Manufacturer="Stackpole Electronics", Manufacturer Part Number=RMCF0603FT1M00, Max Operating Temperature=155°C, Max Power Dissipation=100mW, Min Operating Temperature=-55°C, Resistance=1MR, Supplier Part Number 1=RMCF0603FT1M00CT-ND, Temperature Coefficient=100ppm/°C, Tolerance=1%, Working Voltage=75V, Case Code (Imperial)=0603, ComponentLink1Description=https://www.verical.com/server-webapp/html/getDatasheet?partID=363151&src-supplier=Verical, ComponentLink1URL=https://www.verical.com/server-webapp/html/getDatasheet?partID=363151&src-supplier=Verical, Composition="Thick Film", Contact Plating=Tin,Matte, Depth=0.8mm, Features="Automotive AEC-Q200", Height=0.022inch, LatestRevisionDate=29-May-2009, LatestRevisionNote="IPC-7351 Footprint Added.", Lead Free="Lead Free", Length=1.55mm, Military Standard=Not, Mount="Surface Mount", Number of Terminations=2, PackageDescription="Chip Resistor", PackageReference=J1-0603, Packaging="Tape and Reel", Power Rating=100mW, Pricing 1="1=0.1, 10=0.017, 100=0.0068, 1000=0.0031, 2500=0.0027 (USD)", Published=8-Jun-2000, Publisher="Altium Limited", Radiation Hardening=No, Stock 1=683184, Supplier 1=Digi-Key, Width=0.031inch
R9: "Resistor", Case/Package=0603, Case Code (Metric)=1608, Manufacturer=Panasonic, Manufacturer Part Number=ERA-3AEB102V, Max Operating Temperature=155°C, Max Power Dissipation=100mW, Min Operating Temperature=-55°C, Package Quantity=5000, Resistance=1kR, Supplier Part Number 1=P1.0KDBDKR-ND, Temperature Coefficient=25ppm/°C, Tolerance=0.1%, Voltage Rating=75V, Case Code (Imperial)=0603, ComponentLink1Description=http://uk.rs-online.com/webdocs/148c/0900766b8148c48a.pdf?src-supplier=RSComponents, ComponentLink1URL=http://uk.rs-online.com/webdocs/148c/0900766b8148c48a.pdf?src-supplier=RSComponents, ComponentLink2Description=https://industrial.panasonic.com/cdbs/www-data/pdf/RDM0000/AOA0000C307.pdf?src-supplier=Mouser, ComponentLink2URL=https://industrial.panasonic.com/cdbs/www-data/pdf/RDM0000/AOA0000C307.pdf?src-supplier=Mouser, ComponentLink3Description=https://industrial.panasonic.com/cdbs/www-data/pdf/RDM0000/AOA0000C307.pdf?src-supplier=Distrelec, ComponentLink3URL=https://industrial.panasonic.com/cdbs/www-data/pdf/RDM0000/AOA0000C307.pdf?src-supplier=Distrelec, ComponentLink4Description=http://www.alliedelec.com/m/d/b6b0537e86f421aa7f5975bb1d8f429a.pdf?src-supplier=Allied+Electronics, ComponentLink4URL=http://www.alliedelec.com/m/d/b6b0537e86f421aa7f5975bb1d8f429a.pdf?src-supplier=Allied+Electronics, ComponentLink5Description=http://www.farnell.com/datasheets/2059650.pdf?src-supplier=Element14, ComponentLink5URL=http://www.farnell.com/datasheets/2059650.pdf?src-supplier=Element14, ComponentLink6Description=http://www.farnell.com/datasheets/485442.pdf?src-supplier=Element14, ComponentLink6URL=http://www.farnell.com/datasheets/485442.pdf?src-supplier=Element14, ComponentLink7Description=http://industrial.panasonic.com/www-data/pdf/AOA0000/AOA0000CE26.pdf?src-supplier=Future+Electronics, ComponentLink7URL=http://industrial.panasonic.com/www-data/pdf/AOA0000/AOA0000CE26.pdf?src-supplier=Future+Electronics, ComponentLink8Description=http://www.farnell.com/datasheets/2052875.pdf?src-supplier=Farnell, ComponentLink8URL=http://www.farnell.com/datasheets/2052875.pdf?src-supplier=Farnell, ComponentLink9Description=https://industrial.panasonic.com/cdbs/www-data/pdf/RDM0000/AOA0000C307.pdf?src-supplier=Avnet, ComponentLink9URL=https://industrial.panasonic.com/cdbs/www-data/pdf/RDM0000/AOA0000C307.pdf?src-supplier=Avnet, ComponentLink10Description=http://www.farnell.com/datasheets/485442.pdf?src-supplier=Farnell, ComponentLink10URL=http://www.farnell.com/datasheets/485442.pdf?src-supplier=Farnell, ComponentLink11Description=http://industrial.panasonic.com/www-data/pdf/AOA0000/AOA0000CE26.pdf?src-supplier=Avnet+Europe, ComponentLink11URL=http://industrial.panasonic.com/www-data/pdf/AOA0000/AOA0000CE26.pdf?src-supplier=Avnet+Europe, ComponentLink12Description=http://www.produktinfo.conrad.com/datenblaetter/450000-474999/450752-da-01-en-WIDERSTAND_0603_ERA.pdf?src-supplier=Conrad, ComponentLink12URL=http://www.produktinfo.conrad.com/datenblaetter/450000-474999/450752-da-01-en-WIDERSTAND_0603_ERA.pdf?src-supplier=Conrad, Composition="Thin Film", Contact Plating=Tin, Depth=0.8mm, Height=0.45mm, Length=1.6mm, Military Standard=Not, Mount="Surface Mount", Number of Pins=2, Number of Terminations=2, Packaging="Tape and Reel", Power Rating=100mW, Pricing 1="1=0.35, 10=0.3, 100=0.1172, 1000=0.0491, 2500=0.045 (USD)", Radiation Hardening=No, REACH SVHC="No SVHC", Stock 1=972375, Supplier 1=Digi-Key, Termination=SMD/SMT, Width=0.8mm
R10: "Resistor", Case/Package=0603, Case Code (Metric)=1608, Manufacturer="TE Connectivity", Manufacturer Part Number=RN73C1J45K3BTG, Max Operating Temperature=155°C, Min Operating Temperature=-55°C, Number of Resistors=1, Package Quantity=250, Power Rating=63mW, Resistance=45.3kR, Supplier Part Number 1=279-RN73C1J45K3BTG, Temperature Coefficient=10ppm/°C, Tolerance=0.1%, Voltage Rating=50V, Case Code (Imperial)=0603, ComponentLink1Description=https://www.alliedelec.com/m/d/c2fadee5ec306a263fe629753774eeae.pdf?src-supplier=Allied+Electronics, ComponentLink1URL=https://www.alliedelec.com/m/d/c2fadee5ec306a263fe629753774eeae.pdf?src-supplier=Allied+Electronics, ComponentLink2Description=http://www.farnell.com/datasheets/1468317.pdf?src-supplier=Element14, ComponentLink2URL=http://www.farnell.com/datasheets/1468317.pdf?src-supplier=Element14, ComponentLink3Description=http://datasheet.octopart.com/RN73C1J45K3BTG-TE-Connectivity-datasheet-11121106.pdf?src-supplier=Element14, ComponentLink3URL=http://datasheet.octopart.com/RN73C1J45K3BTG-TE-Connectivity-datasheet-11121106.pdf?src-supplier=Element14, ComponentLink4Description=http://datasheet.octopart.com/RN73C1J45K3BTG-TE-Connectivity-datasheet-67796562.pdf?src-supplier=Electro+Sonic, ComponentLink4URL=http://datasheet.octopart.com/RN73C1J45K3BTG-TE-Connectivity-datasheet-67796562.pdf?src-supplier=Electro+Sonic, ComponentLink5Description=http://datasheet.octopart.com/RN73C1J45K3BTG-TE-Connectivity-datasheet-11120284.pdf?src-supplier=Master+Electronics, ComponentLink5URL=http://datasheet.octopart.com/RN73C1J45K3BTG-TE-Connectivity-datasheet-11120284.pdf?src-supplier=Master+Electronics, ComponentLink6Description=http://sigma.octopart.com/14569836/technical_drawing/TE-Connectivity-RN73C1J45K3BTG.pdf?src-supplier=TE+Connectivity, ComponentLink6URL=http://sigma.octopart.com/14569836/technical_drawing/TE-Connectivity-RN73C1J45K3BTG.pdf?src-supplier=TE+Connectivity, ComponentLink7Description=http://datasheet.octopart.com/RN73C1J45K3BTG-TE-Connectivity-datasheet-11120060.pdf?src-supplier=TE+Connectivity, ComponentLink7URL=http://datasheet.octopart.com/RN73C1J45K3BTG-TE-Connectivity-datasheet-11120060.pdf?src-supplier=TE+Connectivity, ComponentLink8Description=http://datasheet.octopart.com/RN73C1J45K3BTG-TE-Connectivity-datasheet-62056503.pdf?src-supplier=Electro+Sonic, ComponentLink8URL=http://datasheet.octopart.com/RN73C1J45K3BTG-TE-Connectivity-datasheet-62056503.pdf?src-supplier=Electro+Sonic, ComponentLink9Description=http://datasheet.octopart.com/RN73C1J45K3BTG-Tyco-Electronics-datasheet-499933.pdf?src-supplier=Element14, ComponentLink9URL=http://datasheet.octopart.com/RN73C1J45K3BTG-Tyco-Electronics-datasheet-499933.pdf?src-supplier=Element14, ComponentLink10Description=http://datasheet.octopart.com/RN73C1J45K3BTG-TE-Connectivity-datasheet-20739865.pdf?src-supplier=Allied+Electronics, ComponentLink10URL=http://datasheet.octopart.com/RN73C1J45K3BTG-TE-Connectivity-datasheet-20739865.pdf?src-supplier=Allied+Electronics, ComponentLink11Description=http://datasheet.octopart.com/RN73C1J45K3BTG-TE-Connectivity-datasheet-62345988.pdf?src-supplier=Element14, ComponentLink11URL=http://datasheet.octopart.com/RN73C1J45K3BTG-TE-Connectivity-datasheet-62345988.pdf?src-supplier=Element14, ComponentLink12Description=http://datasheet.octopart.com/RN73C1J45K3BTG-Tyco-Electronics-datasheet-7537124.pdf?src-supplier=Farnell, ComponentLink12URL=http://datasheet.octopart.com/RN73C1J45K3BTG-Tyco-Electronics-datasheet-7537124.pdf?src-supplier=Farnell, ComponentLink13Description=http://datasheet.octopart.com/RN73C1J45K3BTG-Tyco-Electronics-datasheet-9631308.pdf?src-supplier=Allied+Electronics, ComponentLink13URL=http://datasheet.octopart.com/RN73C1J45K3BTG-Tyco-Electronics-datasheet-9631308.pdf?src-supplier=Allied+Electronics, Composition="Thin Film", Depth=0.8mm, ELV=Compliant, Height=0.45mm, Length=1.55mm, Mount="Surface Mount", Number of Pins=2, Number of Terminations=2, Packaging="Cut Tape", Pricing 1="1=1.47, 10=1.25, 50=1.25, 100=1.14, 250=1.03, 500=0.948, 1000=0.813, 2500=0.759, 5000=0.721, 10000=0.704 (USD)", REACH SVHC="No SVHC", Stock 1=10, Supplier 1=Mouser, Termination=Solder, Voltage Rating (DC)=50V, Weight=7.1E-05oz, Width=0.8mm
TP1 TP2 TP3 TP4 TP5 TP8 TP9 TP10: library part TP
U1: "LDO Regulator Pos 3.3V 0.8A 4-Pin_3+Tab_ SOT-223 T/R", Case/Package=SOT-223, Current Rating=800A, Dropout Voltage=1.2V, Manufacturer="Texas Instruments", Manufacturer Part Number=LM1117IMP-3.3/NOPB, Max Input Voltage=15V, Max Operating Temperature=125°C, Max Output Current=800mA, Max Supply Voltage=10V, Min Input Voltage=2.6V, Min Operating Temperature=-40°C, Min Supply Voltage=4.75V, Nominal Output Voltage=3.3V, Output Voltage Accuracy=1%, Package="SOT-223 Texas Instruments", Package Quantity=1000, Quiescent Current=15mA, Supplier Part Number 1=LM1117IMP-3.3/NOPBCT-ND, Accuracy=1%, Availability=Unavailable, ComponentLink1Description=http://www.jameco.com/Jameco/Products/ProdDS/1281318.pdf?src-supplier=Jameco, ComponentLink1URL=http://www.jameco.com/Jameco/Products/ProdDS/1281318.pdf?src-supplier=Jameco, ComponentLink2Description=http://www.farnell.com/datasheets/1670636.pdf?src-supplier=Element14, ComponentLink2URL=http://www.farnell.com/datasheets/1670636.pdf?src-supplier=Element14, ComponentLink3Description=http://www.ti.com/lit/ds/symlink/lm1117.pdf?src-supplier=Digi-Key, ComponentLink3URL=http://www.ti.com/lit/ds/symlink/lm1117.pdf?src-supplier=Digi-Key, ComponentLink4Description=http://www.farnell.com/datasheets/1882372.pdf?src-supplier=Element14, ComponentLink4URL=http://www.farnell.com/datasheets/1882372.pdf?src-supplier=Element14, ComponentLink5Description=http://www.easyflip.co.uk/Farnell_element14_2013_UK/book.html?page=615&src-supplier=Farnell, ComponentLink5URL=http://www.easyflip.co.uk/Farnell_element14_2013_UK/book.html?page=615&src-supplier=Farnell, ComponentLink6Description=http://www.ti.com/lit/ds/symlink/lm1117-n.pdf?src-supplier=Avnet, ComponentLink6URL=http://www.ti.com/lit/ds/symlink/lm1117-n.pdf?src-supplier=Avnet, ComponentLink7Description=https://www.distrelec.biz/Web/Downloads/_t/ds/lm1117_eng_tds.pdf?mime=application%2Fpdf&src-supplier=Distrelec, ComponentLink7URL=https://www.distrelec.biz/Web/Downloads/_t/ds/lm1117_eng_tds.pdf?mime=application%2Fpdf&src-supplier=Distrelec, Height=1.6mm, Lead Free="Lead Free", Length=6.5mm, MF="Texas Instruments", Min Current Limit=800mA, Mount="Surface Mount", MP=LM1117MP-3.3, Number of Outputs=1, Number of Pins=4, Number of Regulators=1, Output Current=800mA, Output Type=Fixed, Output Voltage=3.3V, Packaging="Tape and Reel", Polarity=Positive, Price=None, Pricing 1="1=1.14, 10=1.015, 100=0.7912, 500=0.6536 (USD)", Radiation Hardening=No, REACH SVHC="No SVHC", SnapEDA_Link=https://www.snapeda.com/parts/LM1117MP-3.3/Texas%20Instruments/view-part/?ref=snap, Stock 1=39229, Supplier 1=Digi-Key, Termination=SMD/SMT, Width=3.56mm
U2: library part LM555, "Timer", Current - Supply=65µA, Frequency=2.7MHz, Manufacturer=STMicroelectronics, Manufacturer Part Number=TS555CD-T, Operating Temperature="0°C ~ 70°C", Package / Case="8-SOIC (0.154\", 3.90mm Width)", Standard Package=1, Supplier Device Package=8-SO, Supplier Part Number 1=497-3043-1-ND, Voltage - Supply="2 V ~ 16 V", Category="Integrated Circuits (ICs)", ComponentLink1Description=http://www.farnell.com/datasheets/1690331.pdf?src-supplier=Element14, ComponentLink1URL=http://www.farnell.com/datasheets/1690331.pdf?src-supplier=Element14, ComponentLink2Description=https://www.verical.com/server-webapp/html/getDatasheet?partID=318879&src-supplier=Verical, ComponentLink2URL=https://www.verical.com/server-webapp/html/getDatasheet?partID=318879&src-supplier=Verical, ComponentLink3Description=http://www.st.com/web/en/resource/technical/document/datasheet/CD00000893.pdf?src-supplier=Avnet+Europe, ComponentLink3URL=http://www.st.com/web/en/resource/technical/document/datasheet/CD00000893.pdf?src-supplier=Avnet+Europe, ComponentLink4Description=http://www.mouser.com/ds/2/389/ts555-957352.pdf?src-supplier=Mouser, ComponentLink4URL=http://www.mouser.com/ds/2/389/ts555-957352.pdf?src-supplier=Mouser, Dynamic Catalog="Programmable Timers and Oscillators", Family="Clock/Timing - Programmable Timers and Oscillators", Mounting Type="Surface Mount", Other Names=497-3043-1, Other Related Documents="TS555 View All Specifications", Packaging="Cut Tape (CT)", Stock 1=0, Supplier 1=Digi-Key, Type="555 Type, Timer/Oscillator (Single)"

## Via types
v1: diameter 15, hole 10, Top Layer to Bottom Layer, 21 vias
v2: diameter 30, hole 20, Top Layer to Bottom Layer, 6 vias

## Nets (pads, with @x,y where several pads share a name; then routed paths per layer and width w, separated by ;. In a path a pad name is that pad's centre, name@x,y a point inside that pad or via, vN(x,y) a via of type N, cw(c..) or ccw(c..) an arc to the next point about the centre after c; other vN are vias at no path point)
EN: H1.5 Q4.1 R11.2 | length 803.5
  Top Layer w10: Q4.1@2314.53,5486.18 Q4.1@2316.5,5486.18 ; R11.2@2420.47,5415 2385.71,5415 Q4.1 2327.28,5495 2450,5495 2475,5520 2475,5630 2510,5665 2740,5665 H1.5
GND: c1.2 c2.2 C3.1 C4.1 C5.1 C6.1 G1.2 H1.2 Q1.1 Q2.1 R6.1 R8.1 R9.1 R10.1 R11.1 R12.1 TP2.1 U1.1 U2.1 | length 1527.1
  Top Layer w10: v1(2150,4210) 2150,4220 2170,4240 2472,4240 2500,4268 v2(2500,4370) 2562.6,4370 R12.1 ; v1(2304,4529) 2329.41,4554.41 G1.2 ; 2377.5,4242.5 C6.1 ; v1(2595,4650) 2595,4592.53 R9.1 ; v1(2600,5365) C4.1@2645,5365 ; U2.1 2770,5397.28 v1(2770,5400) ; Q2.1@2747.6,4992.24 2747.6,5042.6 v1(2750,5045) ; v1(2840,5140) C3.1 ; Q1.1 v1(3007.24,4897.76)
  Top Layer w25: v2(2170,5060) 2215,5060 U1.1@2219,5064 ; v2(2225,4685) c1.2@2225,4775 ; v2(2415,4690) 2415,4765.35 2420,4770.35 c2.2
  Bottom Layer w10: v2(2500,4370) 2500,4320 2605,4215 v1(2725,4215)
  other v1: 2715,4375 2690,4575 2925,4635 2925,4700 2595,5125 2480,5480 2665,5515
  other v2: 2756,4649 2683,4710
IN+: G1.3 R7.1 R9.2 TP9.1 | length 352.7
  Top Layer w10: G1.3 2390.82,4493 2490.4,4493 R7.1 R9.2 2598.06,4447.06 TP9.1
Netc2_1: c2.1 Q4.3 TP8.1 U1.3
NetC3_2: C3.2 U2.5 | length 63.8
  Top Layer w10: U2.5 2951.5,5195.79 C3.2@2951.5,5145
NetC4_2: C4.2 R5.1 U2.2 U2.6 | length 396.8
  Top Layer w10: C4.2 2726.22,5303.5 U2.2 2805,5305 2855,5255 U2.6 R5.1@3020.47,5255
NetD2_1: D2.1 F2.1 Q3.3 | length 2092.1
  Top Layer w10: Q3.3 2230.35,4557.4 D2.1 2245,4409 2247,4407 v1(2322,4407)
  Bottom Layer w10: v1(2322,4407) 2337,4392 2337,4261 2469,4129 F2.1@2469,2684
NetG1_1: G1.1 Q3.2 | length 82.9
  Top Layer w10: Q3.2 2301.6,4567.6 2314,4580 G1.1
NetG1_4: G1.4 Q3.1 R10.2 | length 234.3
  Top Layer w10: Q3.1 R10.2@2352.01,4642.4 ; R10.2 2397,4597.41 2397,4550 2418.18,4528.82 G1.4
NetQ1_2: Q1.2 Q2.3 R1.1 | length 205.4
  Top Layer w10: Q2.3@2785,4897.76 Q1.2 R1.1@2897.6,4805
NetQ2_2: Q2.2 R3.2 | length 295.4
  Top Layer w10: R3.2@2645,5170.47 2705.47,5110 2780,5110 2822.4,5067.6 Q2.2@2822.4,4992.24
NetR4_1: R4.1 R5.2 U2.7 | length 155.4
  Top Layer w10: U2.7 3012.24,5305 3022.85,5315.61 R4.1
OUT_ECE: C6.2 D2.2 H1.4 R12.2 TP10.1 | length 2144.1
  Top Layer w10: D2.2 2399.65,4397.35 2433,4364 2433,4312.5 C6.2 2470,4334.5 2470,4382.43 2503.57,4416 2655,4416 ; TP10.1 2565.06,4235.94 R12.2 2639.47,4309.47 v1(2640,4310) 2655,4325 2655,4416 ; H1.4@2712.08,5590 H1.4 2670,5635 2595,5635 2565,5605 2565,5568.28 2520,5523.28 2520,5388.79 2490,5358.79 2490,5095 2610,4975 2610,4690 2655,4645 2655,4416
OUT_MOIST: C5.2 D1.2 H1.3 R8.2 TP5.1 | length 1510.9
  Top Layer w10: H1.3@2625,5600 H1.3 2540,5515 2540,5380.5 2515,5355.5 2515,5115 2640,4990 2640,4690.35 D1.2 ; TP5.1@2790.35,4420.35 D1.2 ; C5.2@2818.5,4700 R8.2 2818.5,4636.97 2790.35,4608.82 D1.2
PROBE_MOIST: D1.1 Q1.3 R2.1 TP3.1 | length 1683.4
  Top Layer w10: v1(2499,4208) 2578,4208 2680,4310 2745,4310 ; v1(2780,4215) 2745,4250 2745,4310 ; R2.1@2822.03,4797.5 2854.53,4765 3000,4765 3020,4785 ; Q1.3 2992.76,4992.24 3037.5,4947.5 3037.5,4842.5 3020,4825 3020,4580 D1.1@2980,4540 ; D1.1 D1.1@2959.65,4495.35 ; TP3.1 D1.1@2959.65,4495.35 ; 2745,4310 2835,4310 2959.65,4434.65 D1.1@2959.65,4495.35
PWR_OP_AMP: c1.1 F1.1 G1.5 R1.2 R4.2 R7.2 TP1.1 U1.2 U1.4 U2.4 U2.8 | length 2350.4
  Top Layer w10: 3005,5424.53 TP1.1
  Top Layer w25: 2310,4995 U1.2
  Bottom Layer w10: v1(2555,4650) 2555,4430 2655,4330 2775,4330 2828,4277 2828,4180 2764,4116 F1.1@2764,2684
Q: R2.2 R3.1 R6.2 TP4.1 U2.3 | length 833.3
  Top Layer w10: TP4.1 2575,5300 2575,5250 R6.2@2575,5230 ; R6.2@2575,5229.53 R6.2@2575,5230 ; R6.2@2595,5229.53 2684.53,5229.53 2710,5255 U2.3 ; R2.2@2760.47,4798.94 2756.54,4795 2685,4795 2670,4810 2670,4990 2535,5125 2535,5215 2550,5230 R6.2@2575,5230
VIN: H1.1 Q4.2

## Polygon pours and split planes (outlines as drawn)
GND on Bottom Layer "Top Layer-No Net" (solid, pour order 0): 2127.87,4271.61 2324.72,4271.61 2324.72,4330.66 2127.87,4330.66 2127.87,5314.91 cw(c2620,5314.91) 3112.13,5314.91 3112.13,4330.66 2915.28,4330.66 2915.28,4271.61 3112.13,4271.61

## Other copper
Top Layer:
  rectangle net PROBE_MOIST: 2175.04,3784.06 2510,3902.17
  rectangle net GND: 2150,3622.64 2490,3740.75
  rectangle net PROBE_MOIST: 2175.04,3461.23 2510,3579.34
  rectangle net GND: 2150,3299.81 2490,3417.92
  rectangle net PROBE_MOIST: 2175.04,2815.57 2515,2933.68
  rectangle net GND: 2150,2654.15 2490,2772.26
  rectangle net PROBE_MOIST: 2175.04,2492.74 2510,2610.85
  rectangle net GND: 2145,2331.32 2490,2449.43
  rectangle net PROBE_MOIST: 2175.04,2169.91 2510,2288.02
  rectangle net GND: 2150,2008.49 2490,2126.6
  rectangle net PROBE_MOIST: 2175.04,1847.08 2510,1965.19
  rectangle net GND: 2155,1685.66 2490,1803.77
  rectangle net PROBE_MOIST: 2175.04,1524.25 2520,1642.36
  rectangle net GND: 2150,1362.83 2490,1480.94
  rectangle net PROBE_MOIST: 2175.04,1201.42 2515,1319.53
  rectangle net PROBE_MOIST: 2185,4106.89 2505,4225
  rectangle net GND: 2150,1040 2490,1158.11
  rectangle net GND: 2155,3945.47 2490,4063.58
  rectangle net GND: 2155,2976.98 2490,3095.09
  rectangle net PROBE_MOIST: 2175.04,3138.4 2515,3256.51
  rectangle net PROBE_MOIST: 2750.04,3143.4 3090,3261.51
  rectangle net GND: 2730,2981.98 3065,3100.09
  rectangle net GND: 2730,3950.47 3065,4068.58
  rectangle net GND: 2725,1045 3065,1163.11
  rectangle net PROBE_MOIST: 2760,4111.89 3080,4230
  rectangle net PROBE_MOIST: 2750.04,1206.42 3090,1324.53
  rectangle net GND: 2725,1367.83 3065,1485.94
  rectangle net PROBE_MOIST: 2750.04,1529.25 3095,1647.36
  rectangle net GND: 2730,1690.66 3065,1808.77